# EAGLE board PowerController (EAGLE 6.6.0)
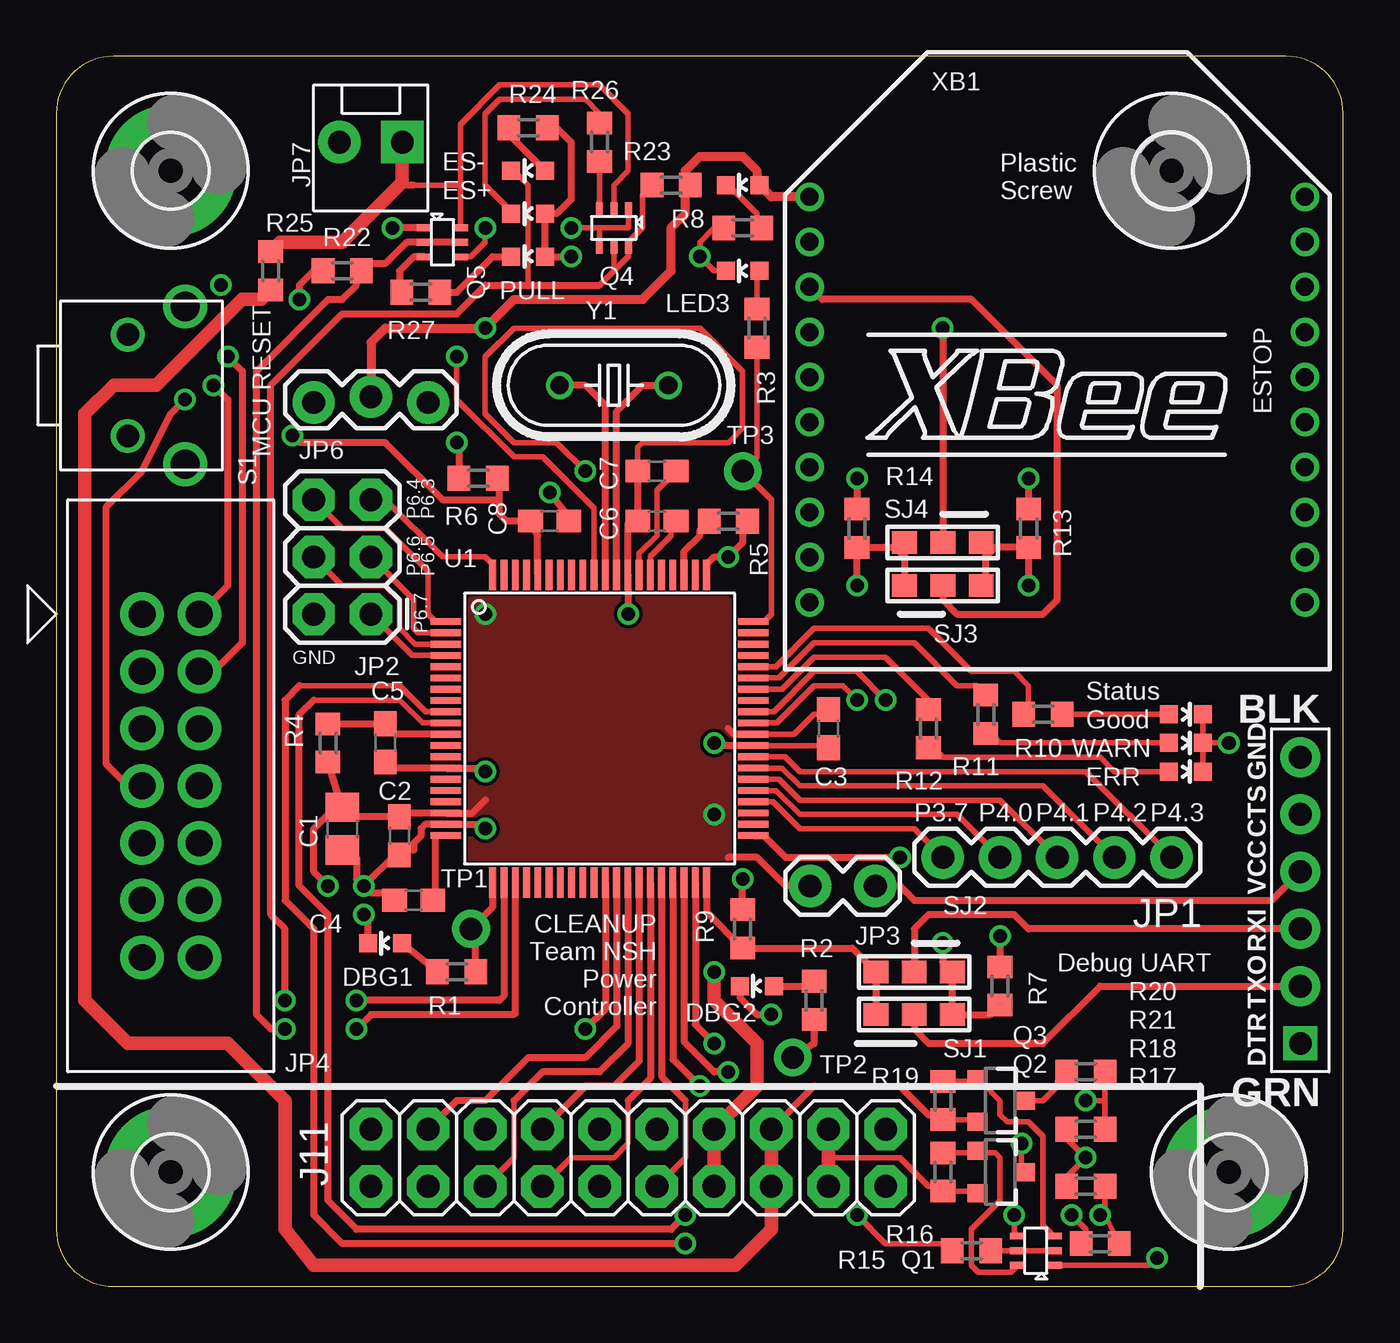
[diagram p0: board, top side]
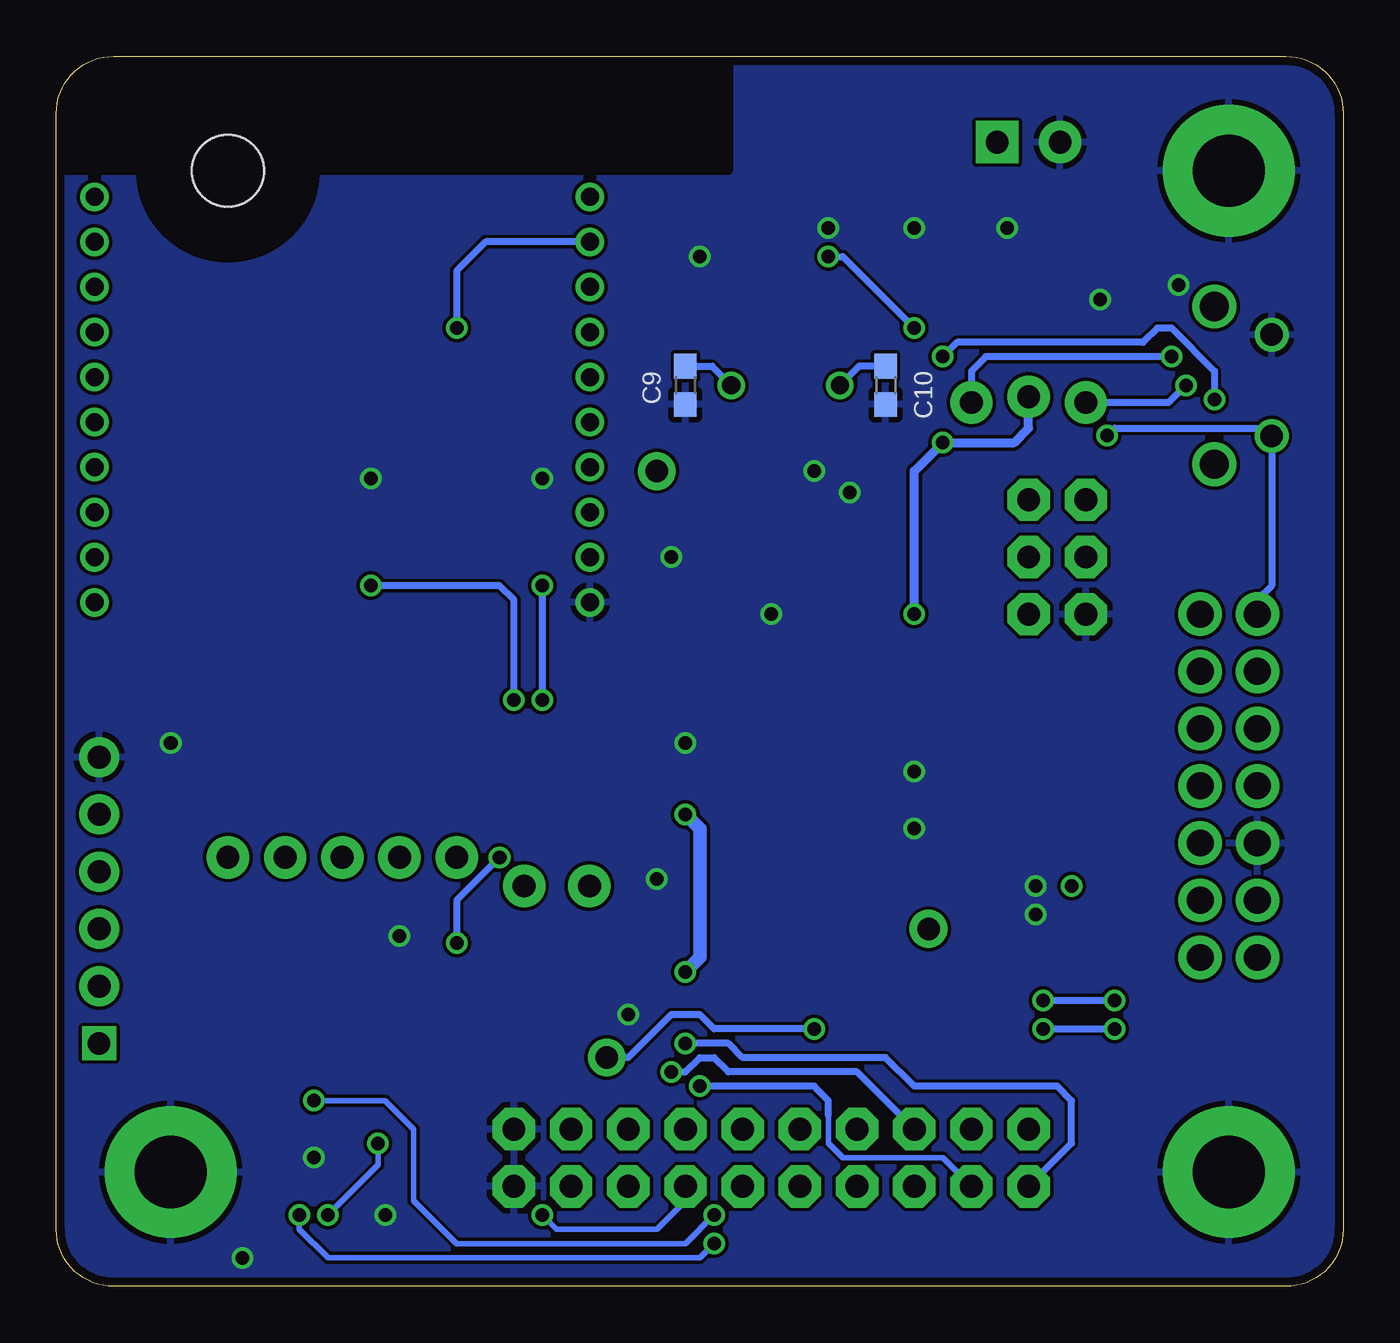
[diagram p1: board, bottom side, seen from below]

Size 57.15 x 54.61 mm. Coordinates in mm from the lower left corner, seen from the top.
Outline: 57.15,2.54 57.15,52.07 arc90 54.61,54.61 2.54,54.61 arc90 0,52.07 0,2.54 arc90 2.54,0 54.61,0 arc90 57.15,2.54
Copper layers (1*16): Top 0.0356mm / dielectric 1.5011mm / Bottom 0.0356mm
Design rules "OshPark": minimum track width 6mil, minimum drill 13mil, track to track 6mil, track to pad 6mil, pad to pad 6mil, via to via 6mil, smd to smd 6mil, copper to edge 15mil, drill to drill 6mil, minimum pad ring 7mil, minimum via ring 7mil, stop-mask expansion 4mil, vias tented up to drill 0mil, thermal gap 10mil
bRestrict: area 27.3,49.5 to 57.1,54.6

## Footprints (pad centres in the part's own frame; a part is rotated, then mirrored left to right if it is on the bottom)
C0805 = smd 1.3 x 1.5: 1 -0.95,0; 2 0.95,0
C0603 = smd 1.1 x 1: 1 -0.85,0; 2 0.85,0
3,2-PAD = drill 3.2 pad 5.842: B3,2 0,0
3,2 = hole 3.2: 0,0
2X10 = drill 1.016 pad 1.88 octagon: 1 -11.43,-1.27; 2 -11.43,1.27; 3 -8.89,-1.27; 4 -8.89,1.27; 5 -6.35,-1.27; 6 -6.35,1.27; 7 -3.81,-1.27; 8 -3.81,1.27; 9 -1.27,-1.27; 10 -1.27,1.27; 11 1.27,-1.27; 12 1.27,1.27; 13 3.81,-1.27; 14 3.81,1.27; 15 6.35,-1.27; 16 6.35,1.27; 17 8.89,-1.27; 18 8.89,1.27; 19 11.43,-1.27; 20 11.43,1.27
1X05 = drill 1.016 pad 1.88: 1 0,0; 2 2.54,0; 3 5.08,0; 4 7.62,0; 5 10.16,0
2X3 = drill 1.016 pad 1.88 octagon: 1 0,0; 2 0,2.54; 3 2.54,0; 4 2.54,2.54; 5 5.08,0; 6 5.08,2.54
1X02_LOCK = drill 1.016 pad 1.88: 1 -0.178,0; 2 2.718,0
ONSHORE_OST302-S141 = drill 1.194 pad 1.93: 1 -7.62,-1.27; 2 -7.62,1.27; 3 -5.08,-1.27; 4 -5.08,1.27; 5 -2.54,-1.27; 6 -2.54,1.27; 7 0,-1.27; 8 0,1.27; 9 2.54,-1.27; 10 2.54,1.27; 11 5.08,-1.27; 12 5.08,1.27; 13 7.62,-1.27; 14 7.62,1.27
FTDI_DEVICE_SIDE = drill 1 square: P$1 -6.35,0 | drill 1.016 pad 1.778: P$2 -3.81,0; P$3 -1.27,0; P$4 1.27,0; P$5 3.81,0; P$6 6.35,0
1X03_LOCK = drill 1.016 pad 1.88: 1 0,0.127; 2 2.54,-0.127; 3 5.08,0.127
MOLEX-1X2_LOCK = drill 1.016 pad 1.88 square: 1 -0.127,0 | drill 1.016 pad 1.88: 2 2.667,0
LED-0603 = smd 0.8 x 0.8: A 0,-0.75; C 0,0.75
INFINEON_SOT363 = smd 0.3 x 0.7: 1 -0.65,-0.8; 2 0,-0.8; 3 0.65,-0.8; 4 0.65,0.8; 5 0,0.8; 6 -0.65,0.8
SOT23-3 = smd 0.8 x 0.9: 1 -0.95,-1; 2 0.95,-1; 3 0,1.1
R0603 = smd 1 x 1.1: 1 -0.85,0; 2 0.85,0
CK_PTS645-V = drill 1: 1 -2.25,0; 2 2.25,0 | drill 1.3: P$2 3.5,2.55; S1 -3.5,2.55
SOLDERJUMPER_2WAY_OPEN_0603 = smd 1.1 x 1: 1 -1.7,0; 2 0,0; 3 1.7,0
1X01_ROUND = drill 1 pad 1.676: 1 0,0
PN80 = smd 1.35 x 0.3: 1 -6.825,4.75; 2 -6.825,4.25; 3 -6.825,3.75; 4 -6.825,3.25; 5 -6.825,2.75; 6 -6.825,2.25; 7 -6.825,1.75; 8 -6.825,1.25; 9 -6.825,0.75; 10 -6.825,0.25; 11 -6.825,-0.25; 12 -6.825,-0.75; 13 -6.825,-1.25; 14 -6.825,-1.75; 15 -6.825,-2.25; 16 -6.825,-2.75; 17 -6.825,-3.25; 18 -6.825,-3.75; 19 -6.825,-4.25; 20 -6.825,-4.75; 41 6.825,-4.75; 42 6.825,-4.25; 43 6.825,-3.75; 44 6.825,-3.25; 45 6.825,-2.75; 46 6.825,-2.25; 47 6.825,-1.75; 48 6.825,-1.25; 49 6.825,-0.75; 50 6.825,-0.25; 51 6.825,0.25; 52 6.825,0.75; 53 6.825,1.25; 54 6.825,1.75; 55 6.825,2.25; 56 6.825,2.75; 57 6.825,3.25; 58 6.825,3.75; 59 6.825,4.25; 60 6.825,4.75 | smd 0.3 x 1.35: 21 -4.75,-6.825; 22 -4.25,-6.825; 23 -3.75,-6.825; 24 -3.25,-6.825; 25 -2.75,-6.825; 26 -2.25,-6.825; 27 -1.75,-6.825; 28 -1.25,-6.825; 29 -0.75,-6.825; 30 -0.25,-6.825; 31 0.25,-6.825; 32 0.75,-6.825; 33 1.25,-6.825; 34 1.75,-6.825; 35 2.25,-6.825; 36 2.75,-6.825; 37 3.25,-6.825; 38 3.75,-6.825; 39 4.25,-6.825; 40 4.75,-6.825; 61 4.75,6.825; 62 4.25,6.825; 63 3.75,6.825; 64 3.25,6.825; 65 2.75,6.825; 66 2.25,6.825; 67 1.75,6.825; 68 1.25,6.825; 69 0.75,6.825; 70 0.25,6.825; 71 -0.25,6.825; 72 -0.75,6.825; 73 -1.25,6.825; 74 -1.75,6.825; 75 -2.25,6.825; 76 -2.75,6.825; 77 -3.25,6.825; 78 -3.75,6.825; 79 -4.25,6.825; 80 -4.75,6.825
XBEE = drill 0.8 pad 1.27: 1 -11,9; 2 -11,7; 3 -11,5; 4 -11,3; 5 -11,1; 6 -11,-1; 7 -11,-3; 8 -11,-5; 9 -11,-7; 10 -11,-9; 11 11,-9; 12 11,-7; 13 11,-5; 14 11,-3; 15 11,-1; 16 11,1; 17 11,3; 18 11,5; 19 11,7; 20 11,9
HC49U-V = drill 0.813: 1 -2.413,0; 2 2.413,0

## Placement (x,y rotation side)
C1  10uF  [C0805]  12.7,20.32 270 top
C2  0.1uF  [C0603]  15.24,20 270 top
C3  0.1uF  [C0603]  34.29,24.77 270 top
C4  470nF  [C0603]  15.88,17.14 180 top
C5  0.1uF  [C0603]  14.61,24.13 270 top
C6  220nF  [C0603]  26.67,33.97 180 top
C7  220nF  [C0603]  26.67,36.2 180 top
C8  1nF  [C0603]  21.91,33.97 0 top
C9  1nF  [C0603]  29.21,40.01 270 bottom
C10  1nF  [C0603]  20.32,40.01 270 bottom
H1  MOUNT-PAD-ROUND3.2  [3,2-PAD]  5.08,5.08 0 top
H2  MOUNT-PAD-ROUND3.2  [3,2-PAD]  52.07,5.08 0 top
H3  MOUNT-HOLE3.2  [3,2]  49.53,49.53 0 top
H4  MOUNT-PAD-ROUND3.2  [3,2-PAD]  5.08,49.53 0 top
J11  M10X2  [2X10]  25.4,5.71 0 top
JP1  [1X05]  49.53,19.05 180 top
JP2  [2X3]  13.97,29.84 90 top
JP3  M02LOCK  [1X02_LOCK]  33.66,17.78 0 top
JP4  ONSHORE_OST302-S141  [ONSHORE_OST302-S141]  5.08,22.23 270 top
JP5  FTDI_DEVICE  [FTDI_DEVICE_SIDE]  55.24,17.14 90 top
JP6  [1X03_LOCK]  16.51,39.37 180 top
JP7  M02POLAR_LOCK  [MOLEX-1X2_LOCK]  15.24,50.8 180 top
LED1  Status: Red  [LED-0603]  14.61,15.24 90 top
LED2  Status: Red  [LED-0603]  31.11,13.34 90 top
LED3  Status: Red  [LED-0603]  30.48,45.09 90 top
LED4  3V3 OK  [LED-0603]  30.48,48.9 90 top
LED5  Status: Green  [LED-0603]  50.16,25.4 270 top
LED6  Status: Yellow  [LED-0603]  50.16,24.13 270 top
LED7  Status: Red  [LED-0603]  50.16,22.86 270 top
LED8  [LED-0603]  20.95,49.53 90 top
LED9  [LED-0603]  20.95,47.62 90 top
LED10  [LED-0603]  20.95,45.72 90 top
Q1  INFINEON_2N7002_DW  [INFINEON_SOT363]  43.5,1.59 90 top
Q2  BS250F  [SOT23-3]  41.91,5.08 270 top
Q3  BS250F  [SOT23-3]  41.91,8.26 270 top
Q4  INFINEON_2N7002_DW  [INFINEON_SOT363]  24.77,46.99 180 top
Q5  INFINEON_2N7002_DW  [INFINEON_SOT363]  17.14,46.35 270 top
R1  330  [R0603]  17.78,13.97 0 top
R2  330  [R0603]  33.66,12.7 270 top
R3  330  [R0603]  31.11,42.55 270 top
R4  0  [R0603]  12.06,24.13 270 top
R5  1M  [R0603]  29.84,33.97 180 top
R6  47k  [R0603]  18.73,35.88 180 top
R7  10k  [R0603]  41.91,13.34 270 top
R8  330  [R0603]  30.48,46.99 0 top
R9  10k  [R0603]  30.48,15.88 270 top
R10  330  [R0603]  43.81,25.4 180 top
R11  330  [R0603]  41.27,25.4 90 top
R12  330  [R0603]  38.73,24.77 90 top
R13  10k  [R0603]  43.18,33.66 270 top
R14  10k  [R0603]  35.56,33.66 270 top
R15  10k  [R0603]  40.64,1.59 180 top
R16  10k  [R0603]  39.37,5.08 270 top
R17  100k  [R0603]  46.35,1.91 180 top
R18  100k  [R0603]  45.72,4.45 0 top
R19  10k  [R0603]  39.37,8.26 270 top
R20  100k  [R0603]  45.72,9.53 180 top
R21  10k  [R0603]  45.72,6.99 0 top
R22  10k  [R0603]  12.7,45.09 180 top
R23  10k  [R0603]  27.3,48.9 180 top
R24  470  [R0603]  20.95,51.44 180 top
R25  330  [R0603]  9.53,45.09 90 top
R26  470  [R0603]  24.13,50.8 270 top
R27  330  [R0603]  16.19,44.13 180 top
S1  CK_PTS645-V  [CK_PTS645-V]  3.17,40.01 270 top
SJ1  [SOLDERJUMPER_2WAY_OPEN_0603]  38.1,12.06 0 top
SJ2  [SOLDERJUMPER_2WAY_OPEN_0603]  38.1,13.97 180 top
SJ3  [SOLDERJUMPER_2WAY_OPEN_0603]  39.37,31.11 0 top
SJ4  [SOLDERJUMPER_2WAY_OPEN_0603]  39.37,33.02 180 top
TP1  [1X01_ROUND]  18.41,15.88 0 top
TP2  [1X01_ROUND]  32.7,10.16 0 top
TP3  [1X01_ROUND]  30.48,36.2 0 top
U1  MSP430F5521/5/7/9_PN80  [PN80]  24.13,24.77 0 top
XB1  XBEE  [XBEE]  44.45,39.37 0 top
Y1  [HC49U-V]  24.77,40.01 180 top

## Library data of the parts
C1-C10 R1-R27 = rcl
H1-H4 = holes
J11 JP1-JP3 JP5-JP7 = SparkFun-Connectors
JP4 = npol-connectors
LED1-LED10 = SparkFun-LED
Q1 Q4 Q5 = npol-discrete
Q2 Q3 = SparkFun-DiscreteSemi
S1 = npol-electromechanical
SJ1-SJ4 XB1 = microbuilder
TP1-TP3 = microbuilder; BOM: EXCLUDE
U1 = npol-msp430
Y1 = SparkFun-FreqCtrl

## Nets
5VSENSE: R17.1 R18.2 U1.9
12VSENSE: R20.1 R21.2 U1.10
+3V3: C1.1 C2.1 C3.1 J11.13 J11.14 JP3.1 JP6.2 LED4.A LED9.A LED10.A R4.2 R6.2 R15.2 R23.1 R24.1 U1.18 U1.50 XB1.1
+5V: J11.17 J11.18 Q2.2 R16.2
+12V: J11.15 J11.16 Q3.2 R19.2 R25.1
AVCC: C5.1 R4.1 U1.11
CAN_/CS: J11.4 U1.32
CAN_/INT: J11.5 U1.33
CAN_/RESET: J11.2
CAN_/RX0BF: J11.8 U1.34
CAN_/RX1BF: J11.7 U1.35
CAN_/TX0RTS: J11.12
CAN_/TX1RTS: J11.9
CAN_/TX2RTS: J11.10
CAN_MISO: J11.6 U1.38
CAN_MOSI: J11.3 U1.37
CAN_SCK: J11.1 U1.39
CAN_STBY: J11.11 U1.36
DBG_LED1: R1.2 TP1.1 U1.21
DBG_LED2: R2.2 TP2.1 U1.31
DBG_LED3: R3.2 TP3.1 U1.60
DBG_RXD: R7.2 SJ1.3 SJ2.1 U1.41
DBG_TXD: R9.2 SJ1.1 SJ2.3 U1.40
ESTOP_INV: LED8.C Q4.5 Q4.6 R23.2 U1.22
ESTOP_OUT: JP7.1 Q4.2 Q5.6 R25.2
ESTOP_PULLDOWN: Q5.2 Q5.5 R22.1 U1.23
GND: C1.2 C2.2 C3.2 C4.2 C5.2 C6.2 C7.2 C8.2 C9.2 C10.2 H1.B3,2 H2.B3,2 H4.B3,2 J11.19 J11.20 JP2.2 JP4.9 JP5.P$6 JP7.2 LED1.C LED2.C LED3.C LED5.C LED6.C LED7.C Q1.1 Q1.4 Q4.1 Q4.4 Q5.1 Q5.4 R5.1 R7.1 R8.1 R9.1 R13.1 R14.1 R18.1 R21.1 R22.2 S1.1 U1.14 U1.19 U1.49 U1.61 U1.68 XB1.10
N$1: JP3.2 JP5.P$4
N$2: LED4.C R8.2
N$3: LED5.A R10.1
N$4: LED6.A R11.1
N$5: LED7.A R12.1
N$6: LED1.A R1.1
N$7: R5.2 U1.63
N$8: LED2.A R2.1
N$9: Q2.3 R17.2
N$10: Q1.6 Q2.1 R16.1
N$11: Q3.3 R20.2
N$12: Q1.2 Q1.5 R15.1
N$13: Q5.3 R27.2
N$14: LED10.C R27.1
N$15: LED8.A R24.2
N$16: Q4.3 R26.2
N$17: LED9.C R26.1
N$36: LED3.A R3.1
NU_P3.7: JP1.5 U1.44
NU_P4.0: JP1.4 U1.45
NU_P4.1: JP1.3 U1.46
NU_P4.2: JP1.2 U1.47
NU_P4.3: JP1.1 U1.48
NU_P6.3: JP2.5 U1.80
NU_P6.4: JP2.6 U1.1
NU_P6.5: JP2.3 U1.2
NU_P6.6: JP2.4 U1.3
NU_P6.7: JP2.1 U1.4
NU_P7.0: U1.5
RXI: JP5.P$3 SJ2.2
SBWTCK: JP4.7 U1.71
SBWTDIO: C8.1 JP4.1 R6.1 S1.2 U1.76
STAT_ERR: R12.2 U1.54
STAT_OK: R10.2 U1.56
STAT_WARN: R11.2 U1.55
TXO: JP5.P$2 SJ1.2
V18: C7.1 U1.67
VCC_TARGET: JP4.4 JP6.1
VCC_TOOL: JP4.2 JP6.3
VCORE: C4.1 U1.20
VTAP_EN: Q1.3 Q3.1 R19.1
VUSB: C6.1 U1.66
XBEE_DIN: SJ3.2 XB1.3
XBEE_DOUT: SJ4.2 XB1.2
XBEE_RXD: R13.2 SJ3.3 SJ4.1 U1.52
XBEE_TXD: R14.2 SJ3.1 SJ4.3 U1.51
XT2IN: C9.1 U1.69 Y1.1
XT2OUT: C10.1 U1.70 Y1.2

## Tracks (layer width: path | path; a pad name or v marks a point on that pad's centre or on a via)
5VSENSE  (via drill 0.6)
  Top 0.254: U1.9 16.39,25.52 15.24,26.67 10.79,26.67 | R18.2 46.57,3.17 | 46.57,3.17 R17.1 | v46.35,3.17 46.57,3.17
  Top 0.305: v27.94,1.91 12.7,1.91 11.43,3.17 11.43,15.88 10.16,17.14 10.16,26.04 10.79,26.67
  Bottom 0.254: v27.94,1.91 28.57,1.27 45.09,1.27 46.35,2.54 v46.35,3.17
12VSENSE  (via drill 0.6)
  Top 0.254: U1.10 16.26,25.02 15.24,26.04 11.43,26.04 | R20.1 46.57,8.26 | 46.57,8.26 R21.2 | v45.72,8.26 46.57,8.26
  Top 0.305: v27.94,3.17 27.3,2.54 13.34,2.54 12.06,3.81 12.06,16.51 10.79,17.78 10.79,25.4 11.43,26.04
  Bottom 0.254: v45.72,8.26 42.55,8.26 41.27,6.99 41.27,3.81 39.37,1.91 29.21,1.91 v27.94,3.17
+3V3  (via drill 0.6)
  Top 0.254: v35.56,3.17 36.83,1.91 39.47,1.91 R15.2 | U1.50 32.77,24.52 33.66,25.4 34.08,25.4 C3.1
  Top 0.305: C1.1 13.12,20.85 C2.1 15.4,21.02 U1.18 18.48,21.02 19.05,21.59 | C1.1 R4.2 | U1.50 30.09,24.52 29.84,24.77 | v12.06,17.78 11.43,18.41 11.43,20.32 12.06,20.95 12.38,20.95 C1.1 | v17.78,37.47 17.88,37.15 R6.2 | JP3.1 32.38,17.78 31.11,19.05 29.84,19.05 | v22.86,45.72 LED10.A LED9.A 22.23,47.62 22.86,48.26 22.86,50.8 22.23,51.44 R24.1
  Top 0.406: XB1.1 31.75,48.37 LED4.A 31.11,49.01 31.11,49.53 30.48,50.16 28.57,50.16 27.94,49.53 27.94,49.11 R23.1 27.94,48.68 27.94,47.62 27.3,46.99 27.3,45.09 26.04,43.81 20.32,43.81 v19.05,42.55 14.61,42.55 13.97,41.91 JP6.2
  Top 0.61: J11.13 J11.14 31.11,8.89 31.11,10.79 29.21,12.7 v29.21,13.97
  Bottom 0.254: J11.13 29.21,3.81 30.48,2.54 34.92,2.54 v35.56,3.17
  Bottom 0.305: 11.85,17.57 v12.06,17.78 | v22.86,45.72 22.23,45.72 v19.05,42.55
  Bottom 0.406: v19.05,29.84 19.05,36.2 v17.78,37.47 14.61,37.47 13.97,38.1 JP6.2
  Bottom 0.61: v29.21,13.97 28.57,14.61 28.57,20.32 v29.21,20.95
  pour Top: 18.41,30.48 18.41,19.05 29.84,19.05 29.84,30.48
+5V
  Top 0.254: R16.2 40.81,4.23 Q2.2 | R16.2 38.95,4.23 | 34.29,5.71 37.47,5.71 38.73,4.45 39.16,4.45 R16.2
  Top 0.61: J11.17 34.29,5.71 J11.18 34.29,7.16 34.47,7.16
+12V
  Top 0.254: R19.2 40.81,7.41 Q3.2
  Top 0.305: J11.16 33.66,8.89 37.47,8.89 38.73,7.62 39.16,7.62 R19.2
  Top 0.61: J11.15 J11.16 | J11.15 31.75,3.81 | J11.15 31.75,2.54 30.16,0.95 11.43,0.95 10.16,2.54 10.16,8.26 7.62,10.79 3.17,10.79 1.27,12.7 1.27,38.73 2.54,40.01 4.45,40.01 8.26,43.81 9.11,43.81 R25.1
AVCC
  Top 0.305: R4.1 C5.1 15.07,24.52 U1.11
CAN_/CS
  Top 0.305: U1.32 24.88,11.54 23.5,10.16 20.95,10.16 19.05,8.26 17.78,8.26 J11.4
CAN_/INT
  Top 0.254: 20.32,8.26 20.32,5.71 J11.5
  Top 0.305: U1.33 25.38,10.78 24.13,9.53 21.59,9.53 20.32,8.26
CAN_/RX0BF
  Top 0.305: U1.34 25.88,10.01 24.77,8.89 23.5,8.89 J11.8
CAN_/RX1BF
  Top 0.254: 25.4,8.26 25.4,6.35 24.77,5.71 22.86,5.71 J11.7
  Top 0.305: U1.35 26.38,9.23 25.4,8.26
CAN_MISO  (via drill 0.6)
  Top 0.305: U1.38 27.88,10.86 29.21,9.53 v29.84,9.53
  Bottom 0.305: J11.6 21.59,9.53 27.3,9.53 27.94,10.16 28.57,10.16 29.21,9.53 v29.84,9.53
CAN_MOSI  (via drill 0.6)
  Top 0.305: U1.37 27.38,10.09 v28.57,8.89
  Bottom 0.254: J11.3 17.78,5.71 22.23,5.71 22.86,6.35 22.86,7.62
  Bottom 0.305: 22.86,7.62 22.86,8.26 23.5,8.89 v28.57,8.89
CAN_SCK  (via drill 0.6)
  Top 0.305: U1.39 28.38,11.62 v29.21,10.79
  Bottom 0.305: J11.1 12.06,6.35 12.06,8.26 12.7,8.89 19.05,8.89 20.32,10.16 26.67,10.16 27.3,10.79 v29.21,10.79
CAN_STBY
  Top 0.254: 27.94,8.26 27.94,5.71 J11.11
  Top 0.305: U1.36 26.88,9.31 27.94,8.26
DBG_LED1
  Top 0.305: R1.2 18.63,15.66 TP1.1 19.38,16.84 U1.21
DBG_LED2  (via drill 0.6)
  Top 0.305: U1.31 24.38,12.31 v23.5,11.43 | R2.2 33.66,10.79 TP2.1
  Bottom 0.305: v23.5,11.43 27.94,11.43 28.57,12.06 29.84,12.06 31.75,10.16 TP2.1
DBG_LED3
  Top 0.254: U1.60 31.42,29.52 31.75,29.84 31.75,34.92 TP3.1 31.11,36.83 R3.2
DBG_RXD  (via drill 0.6)
  Top 0.305: R7.2 41.49,12.06 SJ1.3 SJ2.1 39.37,14.4 v39.37,15.24 | U1.41 31.42,20.02 32.38,19.05 v37.47,19.05
  Bottom 0.305: v37.47,19.05 39.37,17.14 v39.37,15.24
DBG_TXD
  Top 0.305: U1.40 28.88,16.62 R9.2 35.34,15.03 SJ2.3 SJ1.1
ESTOP_INV  (via drill 0.6)
  Top 0.254: LED8.C 20.32,49.53 20.95,48.9 20.95,44.45 | 24.13,44.45 24.77,45.09 | 24.77,45.09 Q4.5 | 24.77,45.09 25.41,45.73 Q4.6 25.41,46.37 26.04,46.99 26.04,48.48 R23.2
  Top 0.305: U1.22 19.88,12.89 19.68,12.7 v13.34,12.7 | v10.16,12.7 10.16,15.88 9.53,16.51 9.53,40.01 12.7,43.18 17.78,43.18 19.05,44.45 20.95,44.45 24.13,44.45
  Bottom 0.305: v13.34,12.7 v10.16,12.7
ESTOP_OUT
  Top 0.254: Q5.6 17.95,48.9 | 17.95,48.9 17.95,51.6 19.68,53.34 24.13,53.34 25.4,52.07 25.4,49.53 24.77,48.9 Q4.2 | 15.88,48.9 17.95,48.9
  Top 0.305: Q5.6 17.77,47.01 | 15.88,48.9 15.49,48.9 15.37,49.02
  Top 0.61: JP7.1 15.37,49.02 12.7,46.35 9.95,46.35 R25.2
ESTOP_PULLDOWN  (via drill 0.6)
  Top 0.305: U1.23 20.38,12.12 20.32,12.06 13.97,12.06 v13.34,11.43 | v10.16,11.43 9.53,11.43 8.89,12.06 8.89,40.64 12.06,43.81 12.7,43.81 13.34,44.45 13.34,44.87 R22.1 13.87,45.4 14.61,45.4 15.56,46.35 Q5.2 Q5.5
  Bottom 0.305: v13.34,11.43 v10.16,11.43
GND  (via drill 0.6)
  Top 0.254: C7.2 25.82,37.25 26.04,37.47 29.84,37.47 30.48,38.1 30.48,40.64 28.57,42.55 20.32,42.55 19.05,41.27 19.05,38.73 20.32,37.47 22.23,37.47 v23.5,36.2 | R21.1 44.87,6.57 v45.72,5.71 44.87,4.87 R18.1 | Q1.1 48.56,0.94 v48.9,1.27 | v42.55,3.17 42.55,2.39 Q1.4 | LED5.C LED6.C | LED6.C LED7.C | LED6.C v52.07,24.13 | U1.49 34.19,24.02 C3.2 | LED3.C 29.21,45.09 v28.57,45.72 28.57,46.35 29.21,46.99 R8.1 | Q5.4 18.4,45.7 19.05,46.35 v19.05,46.99 | Q4.1 25.41,47.01 25.4,46.99 24.13,46.99 | 24.13,46.99 24.13,46.2 Q4.4 | v22.86,46.99 24.13,46.99
  Top 0.305: C1.2 13.02,19.37 13.34,19.05 13.34,18.1 v13.65,17.78 | v13.65,17.78 15.03,19.15 C2.2 15.46,19.37 15.88,19.37 15.88,19.68 16.19,20 16.19,20.32 16.39,20.52 U1.19 18.86,20.52 v19.05,20.32 | C4.2 14.92,17.14 14.61,17.46 13.97,17.46 v13.65,17.78 | C5.2 14.87,23.02 U1.14 18.89,23.02 v19.05,22.86 | U1.49 29.32,24.02 v29.21,24.13 | v25.4,29.84 25.38,29.86 U1.68 25.38,33.85 C6.2 C7.2 | U1.61 28.88,32.05 29.21,32.38 v29.84,32.38 30.48,33.02 30.48,33.66 30.7,33.87 R5.1 | C8.2 22.76,34.19 v21.91,35.24 | LED1.C 13.86,16.39 v13.65,16.51 | R9.1 v30.48,18.1 | LED2.C 30.36,12.81 31.11,12.06 v31.75,12.06 | v41.91,15.56 R7.1 | v35.56,35.88 R14.1 | v43.18,35.88 R13.1 | R22.2 11.43,45.09 10.79,44.45 v10.79,43.81 | Q5.1 15.86,47.01 v14.92,46.99
  other vias: 7.3,44.45
  pour Bottom: 0,0 0,54.61 57.15,54.61 57.15,0
N$1
  Top 0.305: JP3.2 37.47,17.78 38.1,17.14 53.98,17.14 JP5.P$4
N$2
  Top 0.254: LED4.C 29.84,48.9 31.11,47.62 31.11,47.2 R8.2
N$3
  Top 0.254: R10.1 LED5.A
N$4
  Top 0.254: R11.1 41.49,24.55 41.91,24.13 LED6.A
N$5
  Top 0.254: R12.1 38.95,23.91 39.37,23.5 46.35,23.5 46.99,22.86 LED7.A
N$6
  Top 0.305: LED1.A R1.1
N$7
  Top 0.305: U1.63 27.88,32.64 28.57,33.34 28.57,33.55 R5.2
N$8
  Top 0.305: LED2.A 33.44,13.34 R2.1
N$9  (via drill 0.6)
  Top 0.254: Q2.3 43.01,5.25 42.86,5.4 v42.86,6.35 | v45.09,3.17 45.72,2.54 45.72,2.12 R17.2
  Bottom 0.254: v42.86,6.35 42.86,5.4 v45.09,3.17
N$10
  Top 0.254: R16.1 40.81,5.93 | 40.81,5.93 Q2.1 | 40.81,5.93 41.7,5.93 41.91,5.71 41.91,3.81 40.64,2.54 40.64,0.95 40.96,0.64 42.4,0.64 Q1.6
N$11
  Top 0.254: Q3.3 43.81,8.26 44.45,8.89 44.45,9.11 R20.2
N$12
  Top 0.254: Q1.2 Q1.5 R15.1
N$13
  Top 0.305: Q5.3 15.86,45.7 15.24,45.09 15.24,44.23 R27.2
N$14
  Top 0.305: R27.1 17.78,44.13 19.37,45.72 LED10.C
N$15
  Top 0.305: R24.2 20.11,51.13 LED8.A
N$16
  Top 0.254: R26.2 24.13,47.8 Q4.3
N$17
  Top 0.254: LED9.C 20.2,47.74 19.05,48.9 19.05,52.07 19.68,52.7 23.5,52.7 24.13,52.07 R26.1
N$36
  Top 0.254: R3.1 31.11,44.97 LED3.A
NU_P3.7
  Top 0.254: U1.44 31.82,21.52 33.02,20.32 38.1,20.32 JP1.5
NU_P4.0
  Top 0.254: U1.45 31.96,22.02 33.02,20.95 40.01,20.95 JP1.4
NU_P4.1
  Top 0.254: U1.46 32.09,22.52 33.02,21.59 41.91,21.59 JP1.3
NU_P4.2
  Top 0.254: U1.47 32.23,23.02 33.02,22.23 43.81,22.23 JP1.2
NU_P4.3
  Top 0.254: U1.48 32.37,23.52 33.02,22.86 45.72,22.86 JP1.1
NU_P6.3
  Top 0.254: U1.80 19.38,32.05 19.05,32.38 17.14,32.38 14.61,34.92 JP2.5
NU_P6.4
  Top 0.254: U1.1 16.84,29.52 16.51,29.84 16.51,31.75 14.61,33.66 12.7,33.66 JP2.6
NU_P6.5
  Top 0.254: U1.2 16.07,29.02 15.88,29.21 15.88,30.48 JP2.3
NU_P6.6
  Top 0.254: U1.3 15.94,28.52 15.24,29.21 15.24,30.48 14.61,31.11 12.7,31.11 JP2.4
NU_P6.7
  Top 0.254: U1.4 15.8,28.02 JP2.1
RXI
  Top 0.305: JP5.P$3 43.18,15.88 42.55,16.51 38.73,16.51 38.1,15.88 SJ2.2
SBWTCK  (via drill 0.6)
  Top 0.254: U1.71 23.88,34.54 21.59,36.83 20.32,36.83 17.78,39.37 v17.78,41.27
  Top 0.305: JP4.7 3.17,22.23 2.22,23.18 2.22,34.61 3.81,36.2 5.08,38.73 v5.71,39.37
  Bottom 0.305: v17.78,41.27 17.14,41.91 8.89,41.91 8.26,42.55 7.62,42.55 5.71,40.64 v5.71,39.37
SBWTDIO  (via drill 0.6)
  Top 0.305: U1.76 21.38,33.33 C8.1 20,33.97 19.68,34.29 19.68,34.92 | 19.68,34.92 19.68,35.77 R6.1 | 19.68,34.92 17.14,34.92 14.61,37.47 10.79,37.47 v10.48,37.78
  Bottom 0.305: v10.48,37.78 10.16,38.1 3.52,38.1 S1.2 3.17,31.11 3.81,30.48 JP4.1
STAT_ERR
  Top 0.254: U1.54 32.23,26.52 33.66,27.94 36.83,27.94 38.73,26.04 R12.2
STAT_OK
  Top 0.254: U1.56 31.96,27.52 33.66,29.21 38.73,29.21 40.64,27.3 42.55,27.3 43.18,26.67 43.18,25.61 R10.2
STAT_WARN
  Top 0.254: U1.55 32.09,27.02 33.66,28.57 38.1,28.57 40.01,26.67 40.85,26.67 R11.2
TXO
  Top 0.305: SJ1.2 38.1,11.43 38.73,10.79 43.81,10.79 46.35,13.34 JP5.P$2
V18
  Top 0.254: U1.67 25.88,32.55 26.67,33.34 26.67,35.34 C7.1
VCC_TARGET  (via drill 0.6)
  Top 0.305: JP4.4 6.99,27.3 8.26,28.57 8.26,40.64 v7.62,41.27
  Bottom 0.305: v7.62,41.27 15.88,41.27 16.51,40.64 JP6.1
VCC_TOOL  (via drill 0.6)
  Top 0.305: JP4.2 7.62,31.11 7.62,39.37 v6.99,40.01
  Bottom 0.305: JP6.3 7.75,39.24 v6.99,40.01
VCORE
  Top 0.305: U1.20 16.84,20.02 16.83,20 16.83,17.25 C4.1
VTAP_EN
  Top 0.254: R19.1 40.81,9.11 | 40.81,9.11 Q3.1 | 40.81,9.11 41.06,9.11 41.91,8.26 41.91,7.62 42.23,7.3 43.18,7.3 43.81,6.67 43.81,2.72 Q1.3
VUSB
  Top 0.254: U1.66 26.38,32.41 27.3,33.34 27.3,33.76
  Top 0.305: 27.3,33.76 C6.1
XBEE_DIN
  Top 0.305: SJ3.2 39.37,30.48 40.01,29.84 43.81,29.84 44.45,30.48 44.45,40.01 40.64,43.81 34.01,43.81 XB1.3
XBEE_DOUT  (via drill 0.6)
  Top 0.305: v39.37,42.55 SJ4.2
  Bottom 0.305: XB1.2 38.09,46.37 39.37,45.09 v39.37,42.55
XBEE_RXD  (via drill 0.6)
  Top 0.254: U1.52 31.86,25.52 33.66,27.3 35.56,27.3 v36.83,26.04
  Top 0.305: 41.28,32.8 SJ4.1 41.27,32.81 41.27,32.38 | SJ3.3 41.27,31.11 41.27,32.38 | v43.18,31.11 R13.2 41.7,32.8 41.27,32.38
  Bottom 0.305: v36.83,26.04 36.83,30.48 37.47,31.11 v43.18,31.11
XBEE_TXD  (via drill 0.6)
  Top 0.254: U1.51 32,25.02 33.66,26.67 34.92,26.67 v35.56,26.04
  Top 0.305: v35.56,31.11 R14.2 37.25,32.8 37.67,32.38 | SJ4.3 37.67,32.38 | 37.67,32.38 SJ3.1
  Bottom 0.305: v35.56,26.04 v35.56,31.11
XT2IN
  Top 0.305: U1.69 24.88,38.85 26.04,40.01 Y1.1
  Bottom 0.305: C9.1 28.03,40.85 Y1.1
XT2OUT
  Top 0.305: U1.70 24.38,39.12 23.5,40.01 Y1.2
  Bottom 0.305: C10.1 21.5,40.85 Y1.2

## Text on the board
tNames: ES- | ES+ | Plastic / Screw | PULL | ESTOP | MCU RESET | P6.4 | P6.3 | P6.6 | P6.5 | P6.7 | GND | Status | Good | WARN | ERR | P3.7 | P4.0 | P4.1 | P4.2 | P4.3 | CLEANUP / Team NSH / Power / Controller | Debug UART | DBG1 | DBG2